# EAGLE board ixyssteppercombo (EAGLE 7.2.0)
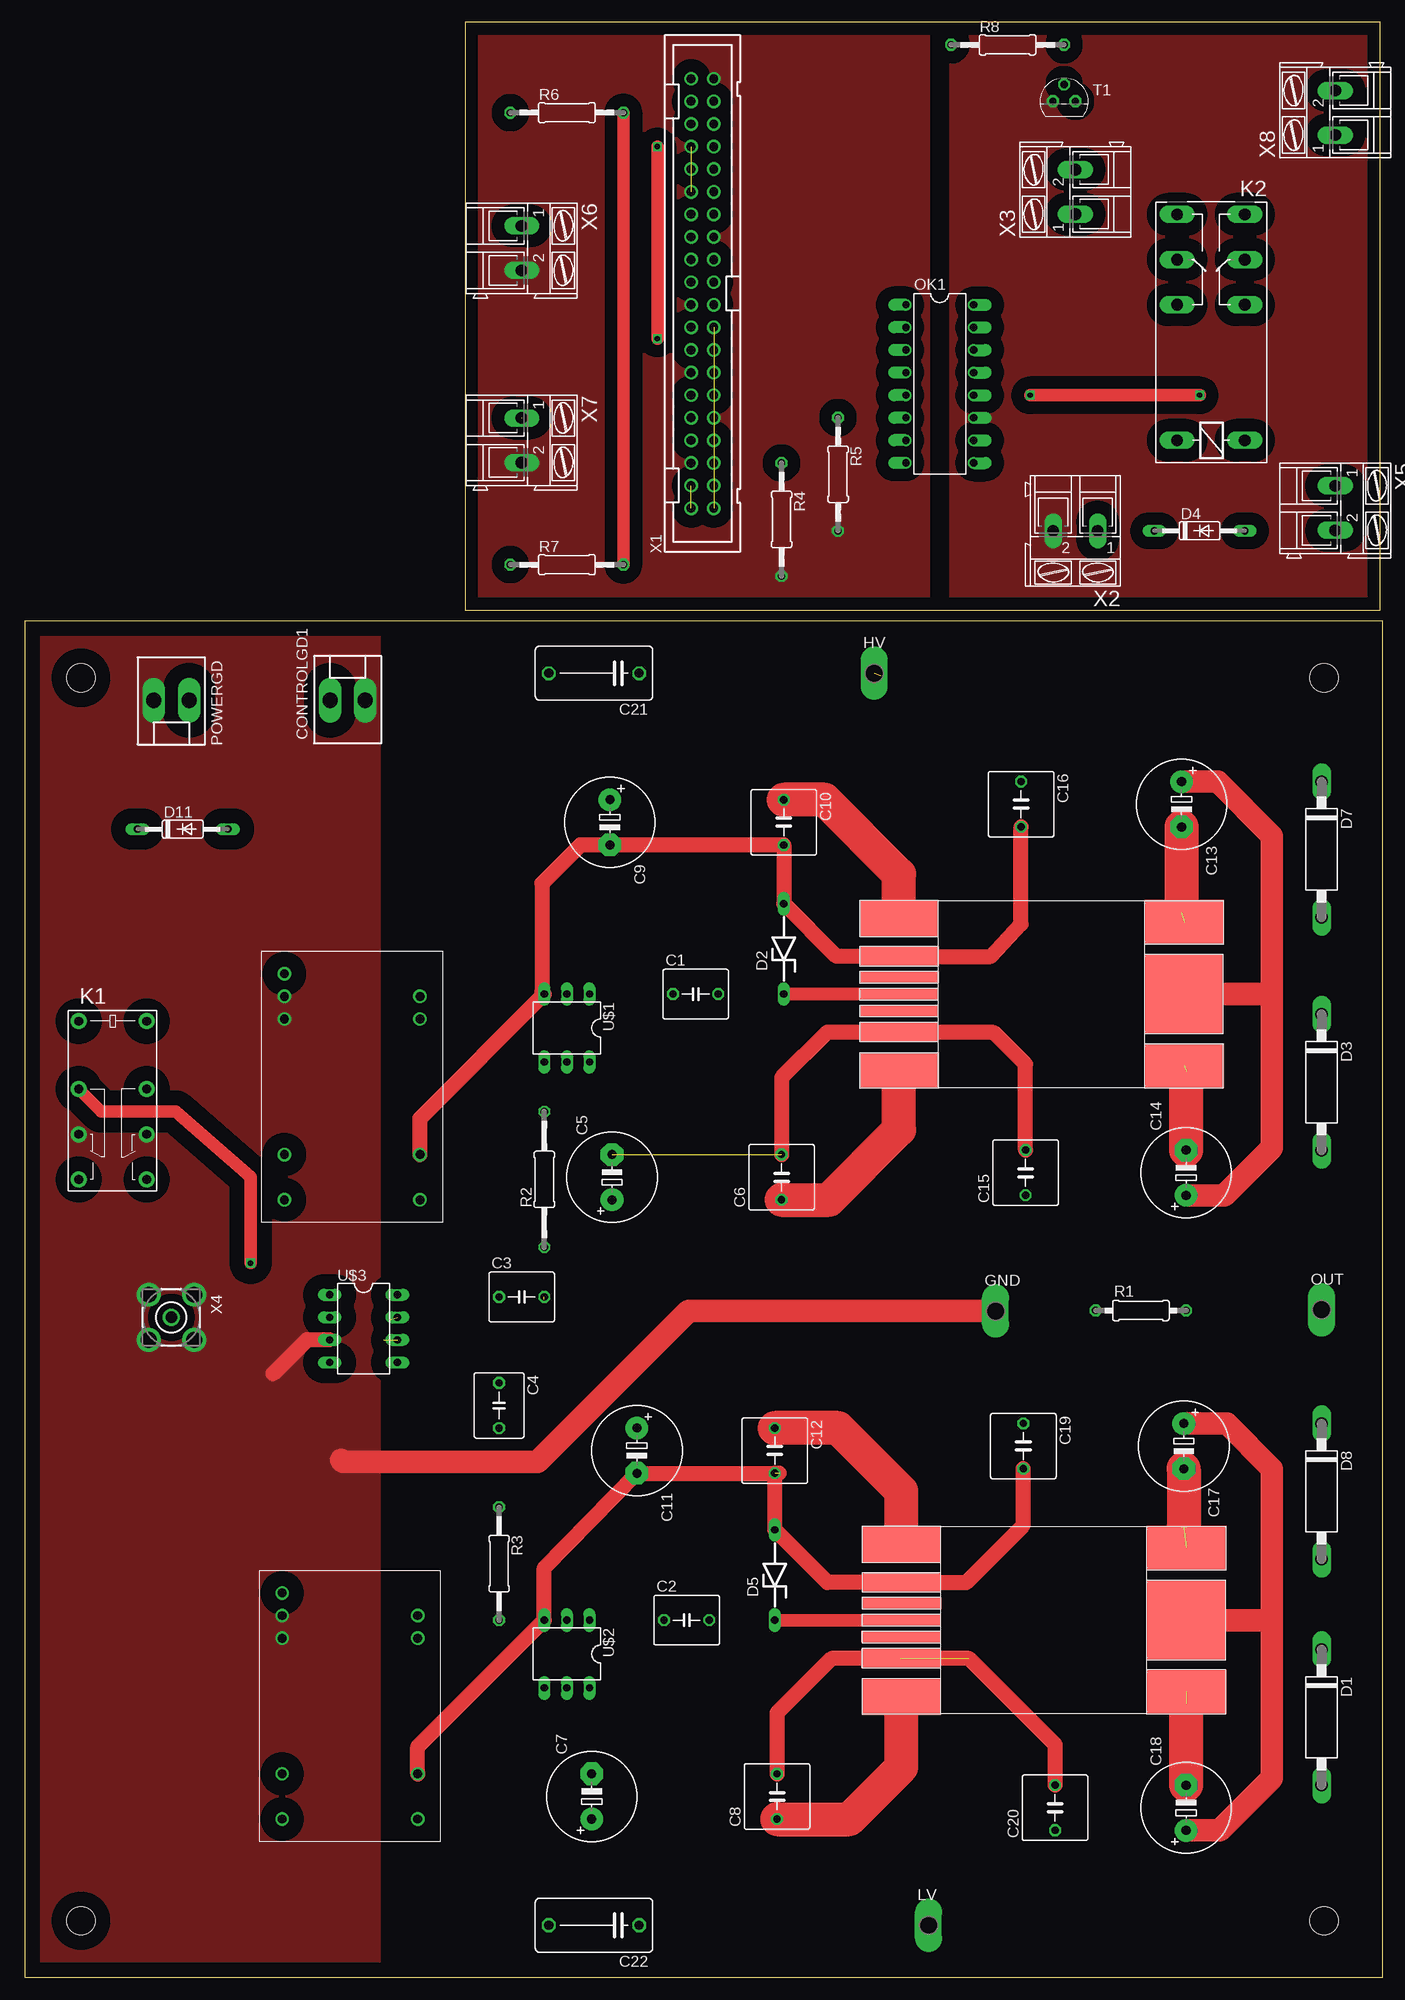
[diagram p0: board, top side]
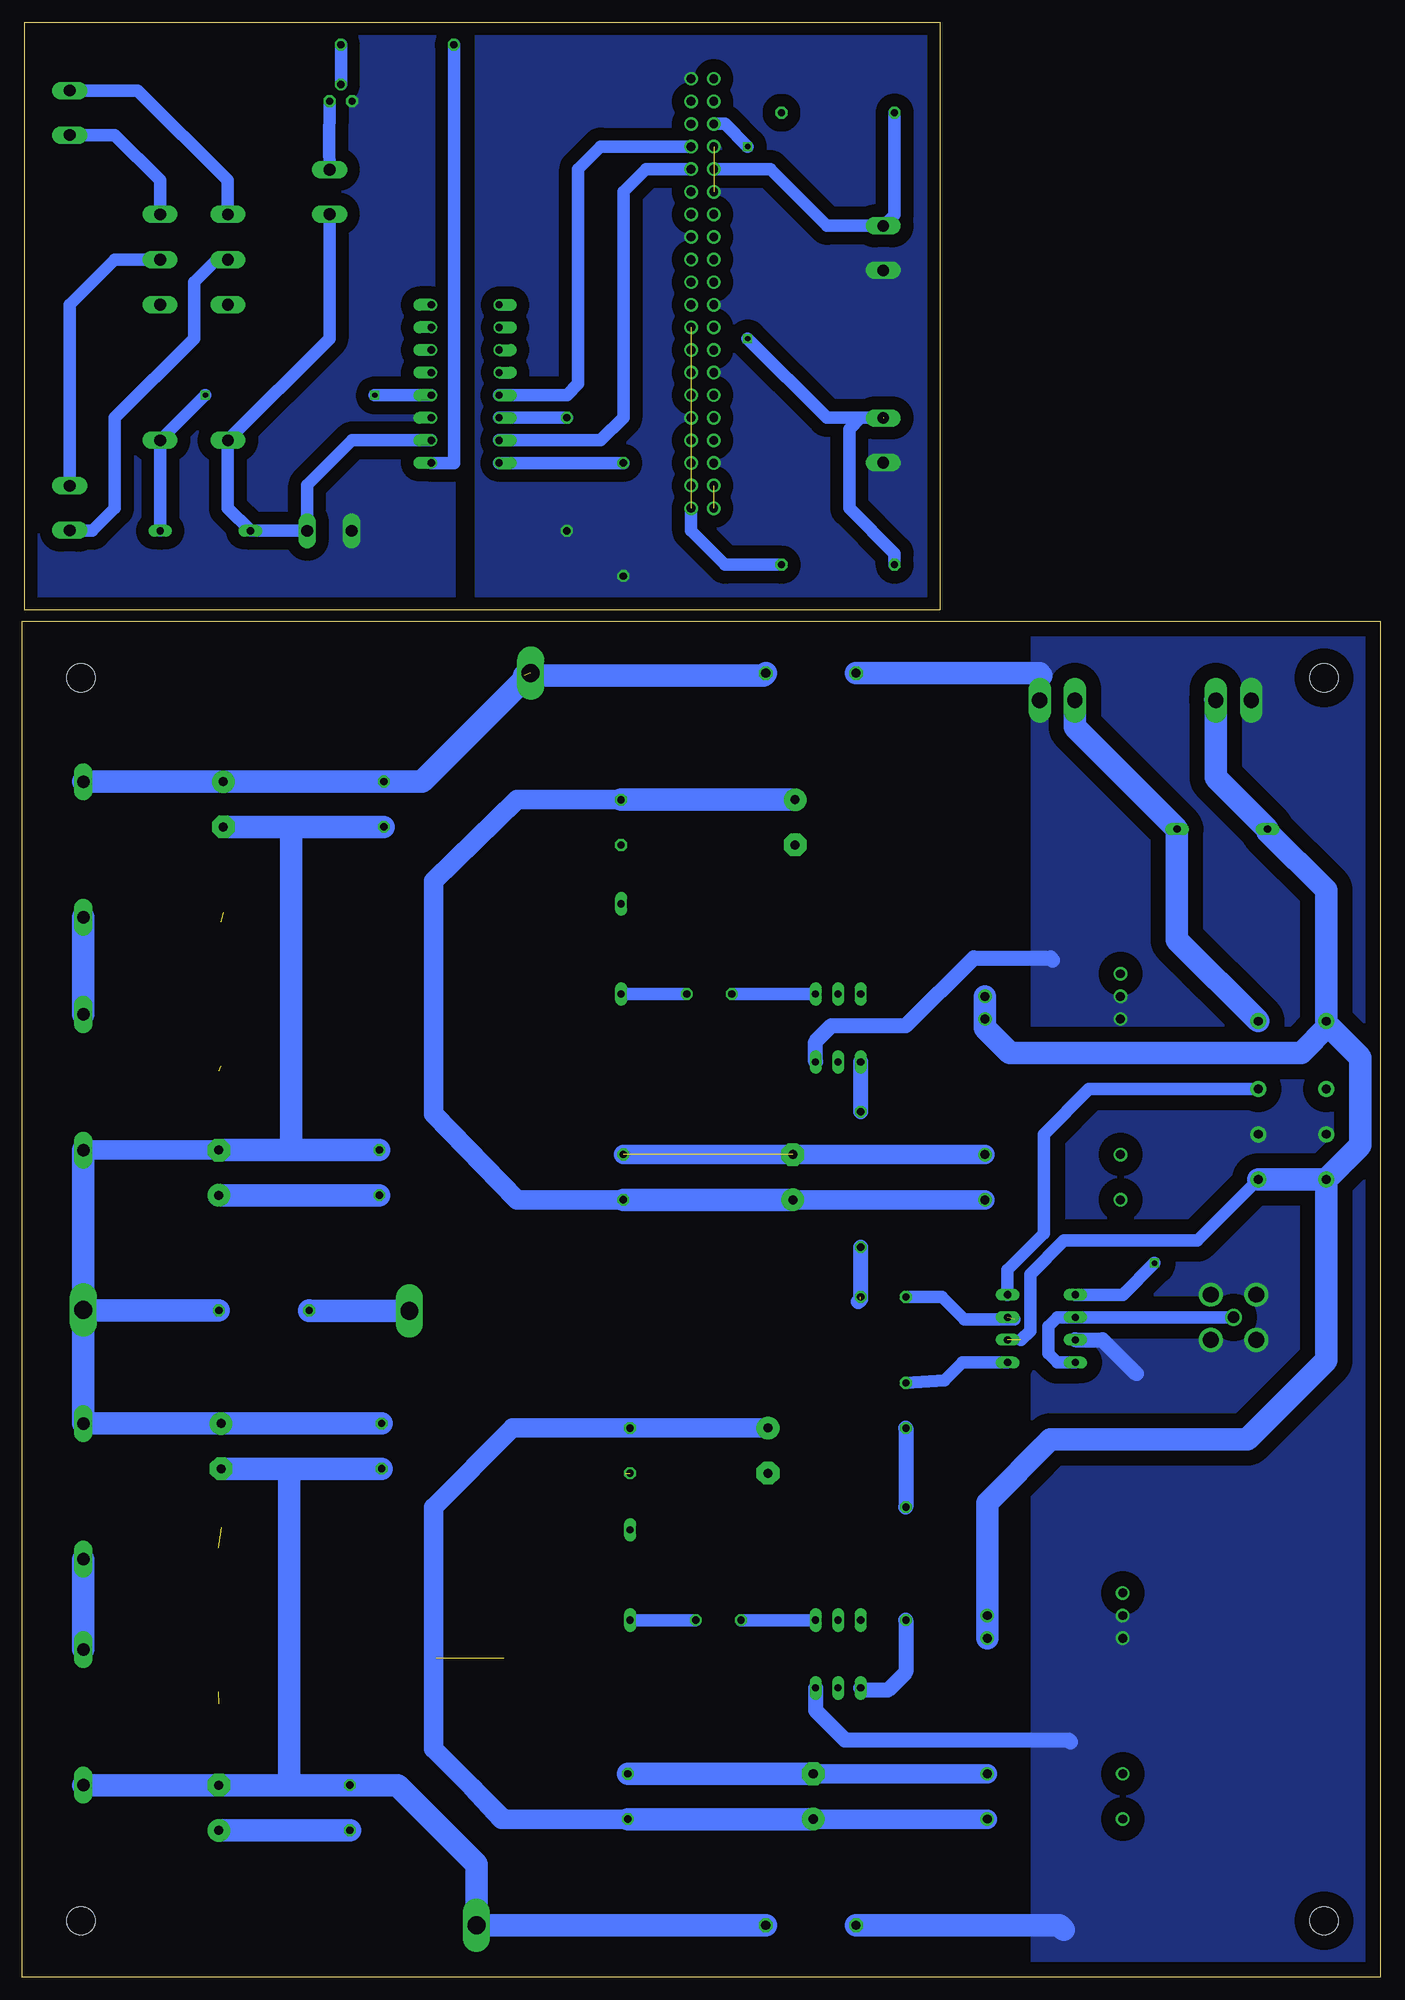
[diagram p1: board, bottom side, seen from below]

Size 152.65 x 219.71 mm. Coordinates in mm from the lower left corner, seen from the top.
Outline: 0,0 152.65,0 152.65,152.4 0,152.4 0,0
Outline: 49.53,153.67 152.38,153.67 152.38,219.71 49.53,219.71 49.53,153.67
Copper layers (1*16): Top 0.035mm / dielectric 1.5mm / Bottom 0.035mm
Design rules "default": minimum track width 10mil, minimum drill 24mil, track to track 8mil, track to pad 8mil, pad to pad 8mil, via to via 8mil, smd to smd 8mil, copper to edge 40mil, drill to drill 8mil, minimum pad ring 10mil, minimum via ring 8mil, stop-mask expansion 4mil, vias tented up to drill 0mil, thermal gap 10mil
Holes 3.2 mm at 146.05,146.05 146.05,6.35 6.35,6.35 6.35,146.05

## Footprints (pad centres in the part's own frame; a part is rotated, then mirrored left to right if it is on the bottom)
C050-055X075 = drill 0.813 octagon: 1 -2.54,0; 2 2.54,0
E5-10,5 = drill 1.016 pad 2.54: + -2.54,0 | drill 1.016 pad 2.54 octagon: - 2.54,0
C050-075X075 = drill 0.813 octagon: 1 -2.54,0; 2 2.54,0
C102-064X133 = drill 1.016 octagon: 1 -5.08,0; 2 5.08,0
KK-156-2 = drill 1.7 pad 2.184 long: 1 -1.98,0; 2 1.98,0
C1702-15 = drill 1.397 long: A 7.62,0; C -7.62,0
ZDIO-10 = drill 0.813 long: A 5.08,0; C -5.08,0
DO35-10 = drill 0.813 long: A 5.08,0; C -5.08,0
NCS = drill 1: P$1 0,0; P$2 2.54,0; P$3 5.08,0; P$4 20.32,0; P$5 25.4,0; P$6 25.4,15.24; P$7 20.32,15.24; P$8 5.08,15.24; P$9 2.54,15.24
P1-20Y = drill 2.007 pad 2.54 long: TP 0,0
G5V-2 = drill 1 pad 1.8: 1 -8.89,-3.81; 4 -1.27,-3.81; 6 3.81,-3.81; 8 8.89,-3.81; 9 8.89,3.81; 11 3.81,3.81; 13 -1.27,3.81; 16 -8.89,3.81
RP420 = drill 1.321 long: 11 16.51,-3.81; 12 11.43,-3.81; 14 21.59,-3.81; 21 16.51,3.81; 22 11.43,3.81; 24 21.59,3.81; A1 -3.81,-3.81; A2 -3.81,3.81
DIL16 = drill 0.813 offset: 1 -8.89,-3.81; 2 -6.35,-3.81; 3 -3.81,-3.81; 4 -1.27,-3.81; 5 1.27,-3.81; 6 3.81,-3.81; 7 6.35,-3.81; 8 8.89,-3.81; 9 8.89,3.81; 10 6.35,3.81; 11 3.81,3.81; 12 1.27,3.81; 13 -1.27,3.81; 14 -3.81,3.81; 15 -6.35,3.81; 16 -8.89,3.81
0207/10 = drill 0.813 octagon: 1 -5.08,0; 2 5.08,0
0207/15 = drill 0.813 octagon: 1 -7.62,0; 2 7.62,0
0207/12 = drill 0.813 octagon: 1 -6.35,0; 2 6.35,0
TO92 = drill 0.813 octagon: 1 1.27,0; 2 0,1.905; 3 -1.27,0
DIL06 = drill 0.813 long: 1 -2.54,-3.81; 2 0,-3.81; 3 2.54,-3.81; 4 2.54,3.81; 5 0,3.81; 6 -2.54,3.81
DIL08 = drill 0.813 long: 1 -3.81,-3.81; 2 -1.27,-3.81; 3 1.27,-3.81; 4 3.81,-3.81; 5 3.81,3.81; 6 1.27,3.81; 7 -1.27,3.81; 8 -3.81,3.81
IXZ631DF12N100 = smd 8.89 x 4.064: P$1 -16.002,8.534; P$7 -15.977,-8.585 | smd 8.89 x 2.159: P$2 -15.977,4.242; P$6 -16.027,-4.293 | smd 8.89 x 1.27: P$3 -15.951,1.88; P$4 -16.078,0; P$5 -16.027,-1.854 | smd 8.89 x 4.953: P$8 16.053,-8.052; P$10 16.053,8.103 | smd 8.89 x 8.89: P$9 16.015,-0.013
PAK100/2500-40 = drill 1 pad 1.422: 1 -24.13,-1.27; 2 -24.13,1.27; 3 -21.59,-1.27; 4 -21.59,1.27; 5 -19.05,-1.27; 6 -19.05,1.27; 7 -16.51,-1.27; 8 -16.51,1.27; 9 -13.97,-1.27; 10 -13.97,1.27; 11 -11.43,-1.27; 12 -11.43,1.27; 13 -8.89,-1.27; 14 -8.89,1.27; 15 -6.35,-1.27; 16 -6.35,1.27; 17 -3.81,-1.27; 18 -3.81,1.27; 19 -1.27,-1.27; 20 -1.27,1.27; 21 1.27,-1.27; 22 1.27,1.27; 23 3.81,-1.27; 24 3.81,1.27; 25 6.35,-1.27; 26 6.35,1.27; 27 8.89,-1.27; 28 8.89,1.27; 29 11.43,-1.27; 30 11.43,1.27; 31 13.97,-1.27; 32 13.97,1.27; 33 16.51,-1.27; 34 16.51,1.27; 35 19.05,-1.27; 36 19.05,1.27; 37 21.59,-1.27; 38 21.59,1.27; 39 24.13,-1.27; 40 24.13,1.27
AK300/2 = drill 1.321 long: 1 -2.515,0; 2 2.489,0
BU-SMA-V = drill 1.27: 1 0,0 | drill 1.778: 2 -2.55,2.55; 3 2.55,2.55; 4 2.55,-2.55; 5 -2.55,-2.55

## Placement (x,y rotation side)
C1  [C050-055X075]  75.44,110.49 0 top
C2  [C050-055X075]  74.42,40.13 0 top
C3  [C050-055X075]  55.88,76.45 0 top
C4  [C050-055X075]  53.34,64.26 270 top
C5  [E5-10,5]  66.04,89.92 90 top
C6  [C050-075X075]  85.09,89.92 90 top
C7  [E5-10,5]  63.75,20.32 90 top
C8  [C050-075X075]  84.58,20.32 90 top
C9  [E5-10,5]  65.79,129.79 270 top
C10  [C050-075X075]  85.34,129.79 270 top
C11  [E5-10,5]  68.83,59.18 270 top
C12  [C050-075X075]  84.33,59.18 270 top
C13  [E5-10,5]  130.05,131.83 270 top
C14  [E5-10,5]  130.56,90.42 90 top
C15  [C050-075X075]  112.52,90.42 90 top
C16  [C050-075X075]  112.01,131.83 270 top
C17  [E5-10,5]  130.3,59.69 270 top
C18  [E5-10,5]  130.56,19.05 90 top
C19  [C050-075X075]  112.27,59.69 270 top
C20  [C050-075X075]  115.82,19.05 90 top
C21  [C102-064X133]  64.01,146.56 180 top
C22  [C102-064X133]  64.01,5.84 180 top
CONTROLGD1  [KK-156-2]  36.32,143.51 0 top
D1  P6KEXXA  [C1702-15]  145.8,29.21 270 top
D2  4742  [ZDIO-10]  85.34,115.57 90 top
D3  P6KEXXA  [C1702-15]  145.8,100.58 270 top
D4  1N4148DO35-10  [DO35-10]  132.08,162.56 0 top
D5  4742  [ZDIO-10]  84.33,45.21 90 top
D7  P6KEXXA  [C1702-15]  145.8,126.75 270 top
D8  P6KEXXA  [C1702-15]  145.8,54.61 270 top
D11  1N4148DO35-10  [DO35-10]  17.78,129.03 0 top
DC1  [NCS]  29.21,112.78 270 top
DC2  [NCS]  28.96,43.18 270 top
GND  TPPAD1-20Y  [P1-20Y]  109.14,74.88 0 top
HV  TPPAD1-20Y  [P1-20Y]  95.5,146.56 0 top
K1  G5V-2  [G5V-2]  9.91,98.55 270 top
K2  RP420005  [RP420]  133.35,176.53 90 top
LV  TPPAD1-20Y  [P1-20Y]  101.6,5.84 0 top
OK1  PS2501"  [DIL16]  102.87,179.07 270 top
OUT  TPPAD1-20Y  [P1-20Y]  145.8,75.01 0 top
POWERGD  [KK-156-2]  16.51,143.51 180 top
R1  [0207/10]  125.48,74.93 0 top
R2  [0207/15]  58.42,89.66 90 top
R3  [0207/12]  53.34,46.48 270 top
R4  200  [0207/12]  85.09,163.83 270 top
R5  200  [0207/12]  91.44,168.91 270 top
R6  1k  [0207/12]  60.96,209.55 0 top
R7  1k  [0207/12]  60.96,158.75 0 top
R8  [0207/12]  110.49,217.17 0 top
T1  2N3904  [TO92]  116.84,210.82 0 top
U$1  DA-2319  [DIL06]  60.96,106.68 180 top
U$2  DA-2319  [DIL06]  60.96,36.32 180 top
U$3  UCC27425  [DIL08]  38.1,72.9 270 top
U$8  IXZ631DF12N100  [IXZ631DF12N100]  114.3,110.49 0 top
U$9  IXZ631DF12N100  [IXZ631DF12N100]  114.55,40.13 0 top
X1  2540-  [PAK100/2500-40]  76.2,189.23 90 top
X2  [AK300/2]  118.11,162.56 180 top
X3  [AK300/2]  118.11,200.66 90 top
X4  BU-SMA-V  [BU-SMA-V]  16.51,74.17 270 top
X5  [AK300/2]  147.32,165.1 270 top
X6  [AK300/2]  55.88,194.31 270 top
X7  [AK300/2]  55.88,172.72 270 top
X8  [AK300/2]  147.32,209.55 90 top

## Library data of the parts
C1-C4 C6 C8 C10 C12 C15 C16 C19 C20 R1-R7 = resistor
C5 C7 C9 C11 C13 C14 C17 C18 C21 C22 R8 = rcl
CONTROLGD1 POWERGD = con-molex; OC_FARNELL: unknown; OC_NEWARK: unknown
D1-D5 D7 D8 D11 = diode
DC1 DC2 = dc-dc-converter
GND HV LV OUT = testpad
K1 = relay; MPN: G5V-2 5DC; OC_FARNELL: 9949488; OC_NEWARK: 78K5703
K2 = relay; MPN: RP420005; OC_FARNELL: unknown; OC_NEWARK: 48M7798
OK1 = optocoupler
T1 = transistor
U$1 U$2 = trafo
U$3 = texas
U$8 U$9 = hvsw
X1 = con-3m; OC_FARNELL: unknown; OC_NEWARK: unknown
X2 X3 X5-X8 = con-ptr500; OC_FARNELL: unknown; OC_NEWARK: unknown
X4 = con-coax; OC_FARNELL: unknown; OC_NEWARK: unknown

## Nets
+3V3: R6.2 R7.2 X1.1 X1.17
+5V: X1.2 X1.4
+12V: D11.C DC1.P$8 DC1.P$9 DC2.P$8 DC2.P$9 K1.1 K1.8 K1.9 POWERGD.1 U$3.6
+24V: D4.C K2.A2 OK1.10 X2.1 X3.1
ENSW: CONTROLGD1.1 D11.A K1.16
GND: C21.2 C22.2 CONTROLGD1.2 DC1.P$2 DC1.P$3 DC2.P$2 DC2.P$3 GND.TP K1.6 K1.11 POWERGD.2 R1.1 U$1.6 U$2.6 U$3.3 X4.2 X4.3 X4.4 X4.5
GND1: R4.2 R5.2 X1.6 X1.9 X1.14 X1.20 X1.25 X1.30 X1.34 X1.39 X6.2 X7.2
GND2: OK1.11 T1.3 X2.2
GPIO5: X1.29
GPIO6: OK1.7 X1.31
GPIO13: OK1.5 X1.33
GPIO19: X1.35
GPIO20: X1.38
GPIO21: X1.40
GPIO26: X1.37
N$1: U$3.2 U$3.4 X4.1
N$2: C3.1 U$3.7
N$3: R2.2 U$1.4
N$4: C4.1 U$3.5
N$5: R3.2 U$2.4
N$6: C4.2 R3.1
N$7: C5.+ C6.1 C9.+ C10.1 DC1.P$6 U$8.P$1 U$8.P$7
N$8: C7.+ C8.1 C11.+ C12.1 DC2.P$6 U$9.P$1 U$9.P$7
N$9: D3.C D7.A
N$10: C1.1 U$1.1
N$11: C2.1 U$2.1
N$12: C1.2 D2.C U$8.P$4
N$13: X1.3
N$14: K1.4 U$3.1
N$15: K1.13 U$3.8
N$16: C3.2 R2.1
N$17: C13.+ C14.+ C15.1 C16.1 C21.1 D7.C HV.TP U$8.P$9
N$18: D1.C D8.A
N$19: C7.- C8.2 C11.- C12.2 C17.- C18.- C19.2 C20.2 C22.1 D1.A D5.A DC2.P$7 LV.TP U$2.3 U$9.P$2 U$9.P$6 U$9.P$8 U$9.P$10
N$20: X1.5
N$21: C5.- C6.2 C9.- C10.2 C13.- C14.- C15.2 C16.2 C17.+ C18.+ C19.1 C20.1 D2.A D3.A D8.C DC1.P$7 OUT.TP R1.2 U$1.3 U$8.P$2 U$8.P$6 U$8.P$8 U$8.P$10 U$9.P$9
N$22: X1.8
N$23: X1.10
N$24: X1.19
N$25: C2.2 D5.C U$9.P$4
N$26: X1.21
N$27: X1.23
N$28: X1.24
N$29: X1.26
N$30: X1.27
N$31: X1.28
N$32: OK1.8 R4.1
N$33: OK1.6 R5.1
N$34: R6.1 X1.32 X6.1
N$35: D4.A K2.A1 OK1.12
N$36: X1.36 X7.1
N$37: R7.1 X7.1
N$38: OK1.9 R8.1
N$39: T1.1 X3.2
N$40: R8.2 T1.2
N$41: K2.11 X5.1
N$42: K2.14 X8.1
N$43: K2.21 X5.2
N$44: K2.24 X8.2

## Tracks (layer width: path | path; a pad name or v marks a point on that pad's centre or on a via)
+3V3  (1 unrouted)
  Top 1.422: R6.2 R7.2
  Bottom 1.422: R7.2 73.66,158.75 77.47,162.56 X1.1
+5V  (1 unrouted)
+12V  (1 unrouted)
  Bottom 1.422: 40.39,71.63 39.37,72.64 39.37,78.99 35.56,82.8 20.57,82.8 K1.9
  Bottom 2.54: 5.84,106.93 6.1,107.19 K1.1 6.1,122.17 12.7,128.78 D11.C 18.49,134.82 POWERGD.1 18.54,143.56 | 5.84,106.93 2.29,103.38 2.29,93.47 K1.8 | K1.8 K1.9 | DC1.P$9 DC1.P$8 44.45,106.68 41.66,103.89 8.89,103.89 5.84,106.93 | DC2.P$8 DC2.P$9 44.2,53.34 37.08,60.45 14.99,60.45 6.1,69.34 K1.8
+24V
  Bottom 1.422: X3.1 118.11,184.15 K2.A2 129.54,165.1 D4.C X2.1 120.62,167.66 115.57,172.72 OK1.10
ENSW
  Bottom 2.54: CONTROLGD1.1 34.34,140.51 D11.A 22.86,116.59 K1.16
GND
  Top 1.676: U$3.3 31.75,71.63 27.94,67.82
  Top 2.54: GND.TP 74.62,74.88 57.66,57.91 35.81,57.91 35.56,58.17
  Bottom 1.676: U$2.6 63.5,29.97 60.2,26.67 35.05,26.67 34.8,26.42 | U$3.3 31.24,71.63 27.43,67.82 | U$1.6 63.5,105.16 61.72,106.93 53.34,106.93 45.72,114.55 37.08,114.55 36.83,114.3
  Bottom 2.54: GND.TP 120.4,74.88 R1.1 | C21.2 38.35,146.56 38.1,146.3 | C22.2 36.07,5.84 35.56,5.33
  pour Bottom (isolate 1.676, no thermals): 0.25,152.4 39.12,152.15 39.12,-0.25 0.25,0
  pour Top (isolate 1.676, no thermals): 0.25,152.15 39.88,151.89 39.88,-0.25 0.25,0
GND1  (1 unrouted)
  pour Bottom (isolate 1.422, no thermals): 49.53,219.71 101.6,219.71 101.6,154.94 49.53,154.94
  pour Top (isolate 1.422, no thermals): 49.53,219.71 101.6,219.71 101.6,154.94 49.53,154.94
GND2
  pour Bottom (isolate 1.422, no thermals): 152.4,219.71 152.4,153.67 104.14,153.67 104.14,219.71
  pour Top (isolate 1.422, no thermals): 104.14,219.71 152.4,219.71 152.4,153.67 104.14,153.67
GPIO6
  Bottom 1.422: X1.31 82.55,203.2 85.09,200.66 85.09,175.26 87.63,172.72 OK1.7
GPIO13
  Bottom 1.422: OK1.5 91.44,177.8 90.17,179.07 90.17,203.2 87.63,205.74 X1.33
N$1
  Bottom 1.422: X4.1 U$3.2 | U$3.2 35.05,74.17 | U$3.2 36.32,74.17 37.34,73.15 37.34,70.1 36.32,69.09 U$3.4
N$2  (1 unrouted)
  Bottom 1.422: C3.1 49.28,76.45 46.74,73.91 41.15,73.91
N$3
  Bottom 1.676: U$1.4 R2.2
N$4
  Bottom 1.422: U$3.5 46.99,69.09 49.02,67.06 C4.1
N$5
  Bottom 1.676: R3.2 53.34,34.29 55.37,32.26 58.17,32.26 U$2.4
N$6
  Bottom 1.676: C4.2 R3.1
N$7
  Top 3.81: C6.1 90.42,87.38 98.3,95.25 98.3,101.88 U$8.P$7 | U$8.P$1 98.3,123.95 89.92,132.33 C10.1
  Bottom 2.184: C5.+ DC1.P$6 | C10.1 97.03,132.33 106.43,123.19 106.43,97.03 97.03,87.38 84.07,87.38
  Bottom 2.54: C9.+ C10.1 | C5.+ 84.07,87.38 C6.1
N$8
  Top 3.81: C8.1 92.71,17.78 98.55,23.62 98.55,31.52 U$9.P$7 | U$9.P$1 98.55,54.61 91.44,61.72 C12.1
  Bottom 2.184: C11.+ C12.1 97.54,61.72 106.43,52.83 106.43,25.65 102.11,21.34 | C7.+ DC2.P$6 | 98.81,18.03 102.11,21.34 | 102.11,21.34 98.81,17.78 84.07,17.78
  Bottom 2.54: C8.1 84.07,17.78 C7.+
N$9
  Bottom 2.54: D7.A D3.C
N$10
  Bottom 1.422: C1.1 U$1.1
N$11
  Bottom 1.422: U$2.1 C2.1
N$12
  Top 1.422: D2.C U$8.P$4
  Bottom 1.422: C1.2 D2.C
N$14  (via drill 0.6)
  Top 1.422: v25.4,80.26 25.4,89.92 17.02,97.28 8.64,97.28 K1.4
  Bottom 1.422: U$3.1 28.96,76.71 v25.4,80.26
N$15
  Bottom 1.422: U$3.8 41.91,79.5 37.85,83.57 37.85,94.74 32.77,99.82 K1.13
N$16  (1 unrouted)
  Bottom 1.676: R2.1 58.42,76.2 58.67,75.95
N$17  (1 unrouted)
  Top 2.54: C14.+ 134.87,87.88 140.21,93.22 140.21,111 | 140.21,111 140.21,128.27 134.11,134.37 C13.+ | U$8.P$9 139.69,110.48 140.21,111
  Bottom 2.54: D7.C C13.+ C16.1 107.7,134.37 HV.TP | C15.1 C14.+ | C21.1 69.34,146.3 96.27,146.3
N$18
  Bottom 2.54: D8.A D1.C
N$19  (4 unrouted)
  Top 1.676: C12.2 D5.A 90.25,44.37 U$9.P$2 105.84,44.37 112.27,50.8 C19.2 | C20.2 115.82,26.16 106.15,35.84 90.7,35.84 84.58,29.72 C8.2 | 84.84,56.64 C11.- 58.42,45.97 U$2.3 44.2,25.91 DC2.P$7
  Top 3.81: C17.- 130.3,50.55 | C18.- 130.56,30.73
  Bottom 2.184: C7.- DC2.P$7
  Bottom 2.54: C19.2 122.68,57.15 | 122.68,57.15 C17.- | C18.- 122.68,21.59 122.68,57.15 | D1.A C20.2 110.49,21.59 101.6,12.7 LV.TP C22.1 | C7.- C8.2
N$21  (3 unrouted)
  Top 1.676: 98.25,106.17 U$8.P$6 90.19,106.2 85.09,101.09 C6.2 | C15.2 112.52,102.62 108.97,106.17 99.06,106.17 98.81,106.43 | C16.2 112.01,118.36 108.64,114.73 U$8.P$2 91.26,114.73 D2.A C10.2 C9.- 62.48,127.25 58.17,122.94 58.17,110.74 U$1.3 44.45,96.52 DC1.P$7
  Top 2.54: C18.+ 134.37,16.51 140.21,22.35 140.21,40.39 | 140.21,40.39 140.21,57.15 135.13,62.23 C17.+ | U$9.P$9 139.94,40.12 140.21,40.39
  Top 3.81: C13.- 130.05,119.63 | C14.- 130.56,101.85
  Bottom 2.184: C14.- D3.A | C6.2 DC1.P$7
  Bottom 2.54: C16.2 122.43,129.29 | 122.43,129.29 C13.- | D3.A OUT.TP | R1.2 145.8,74.93 OUT.TP | C14.- 122.43,92.96 | 122.43,92.96 122.43,129.29 | C15.2 122.43,92.96 | OUT.TP D8.C C17.+ C19.1 | C20.1 C18.+
N$25
  Top 1.422: D5.C U$9.P$4
  Bottom 1.422: D5.C C2.2
N$32
  Bottom 1.422: R4.1 OK1.8
N$33
  Bottom 1.422: R5.1 OK1.6
N$34
  Bottom 1.422: R6.1 54.61,198.09 X6.1 62.2,196.82 68.58,203.2 X1.32
N$35  (via drill 0.6)
  Top 1.422: v132.08,177.8 v113.03,177.8
  Bottom 1.422: v132.08,177.8 K2.A1 D4.A | v113.03,177.8 OK1.12
N$36  (via drill 0.6)  (1 unrouted)
  Top 1.422: v71.12,205.74 v71.12,184.15
  Bottom 1.422: X1.36 73.66,208.28 v71.12,205.74 | v71.12,184.15 62.23,175.26 55.88,175.26
N$37  (1 unrouted)
  Bottom 1.422: R7.1 54.61,160.02 59.69,165.1 59.69,173.99 58.42,175.26 55.88,175.26
N$38
  Bottom 1.422: R8.1 104.14,170.18 OK1.9
N$39
  Bottom 1.422: T1.1 118.16,205.74 X3.2
N$40
  Bottom 1.422: T1.2 R8.2
N$41
  Bottom 1.422: K2.11 142.24,193.04 147.32,187.96 X5.1
N$42
  Bottom 1.422: X8.1 142.26,207.03 137.16,201.93 K2.14
N$43
  Bottom 1.422: K2.21 130.81,193.04 133.35,190.5 133.35,184.15 142.24,175.26 142.24,165.1 144.78,162.56 147.27,162.56 X5.2
N$44
  Bottom 1.422: X8.2 139.65,212.04 129.54,201.93 K2.24